# Altium PCB Quad FC 10.6.7.PcbDoc
Units mm, origin at the board's own origin, x right, y up, seen from the top; angles counter-clockwise.
Board outline 55.25 x 55.25 mm, 2 copper layers (Top Layer, Bottom Layer); 70 components, 50 nets, 277 pads, 13 vias.
Unrouted connection lines stored in the file: 118.
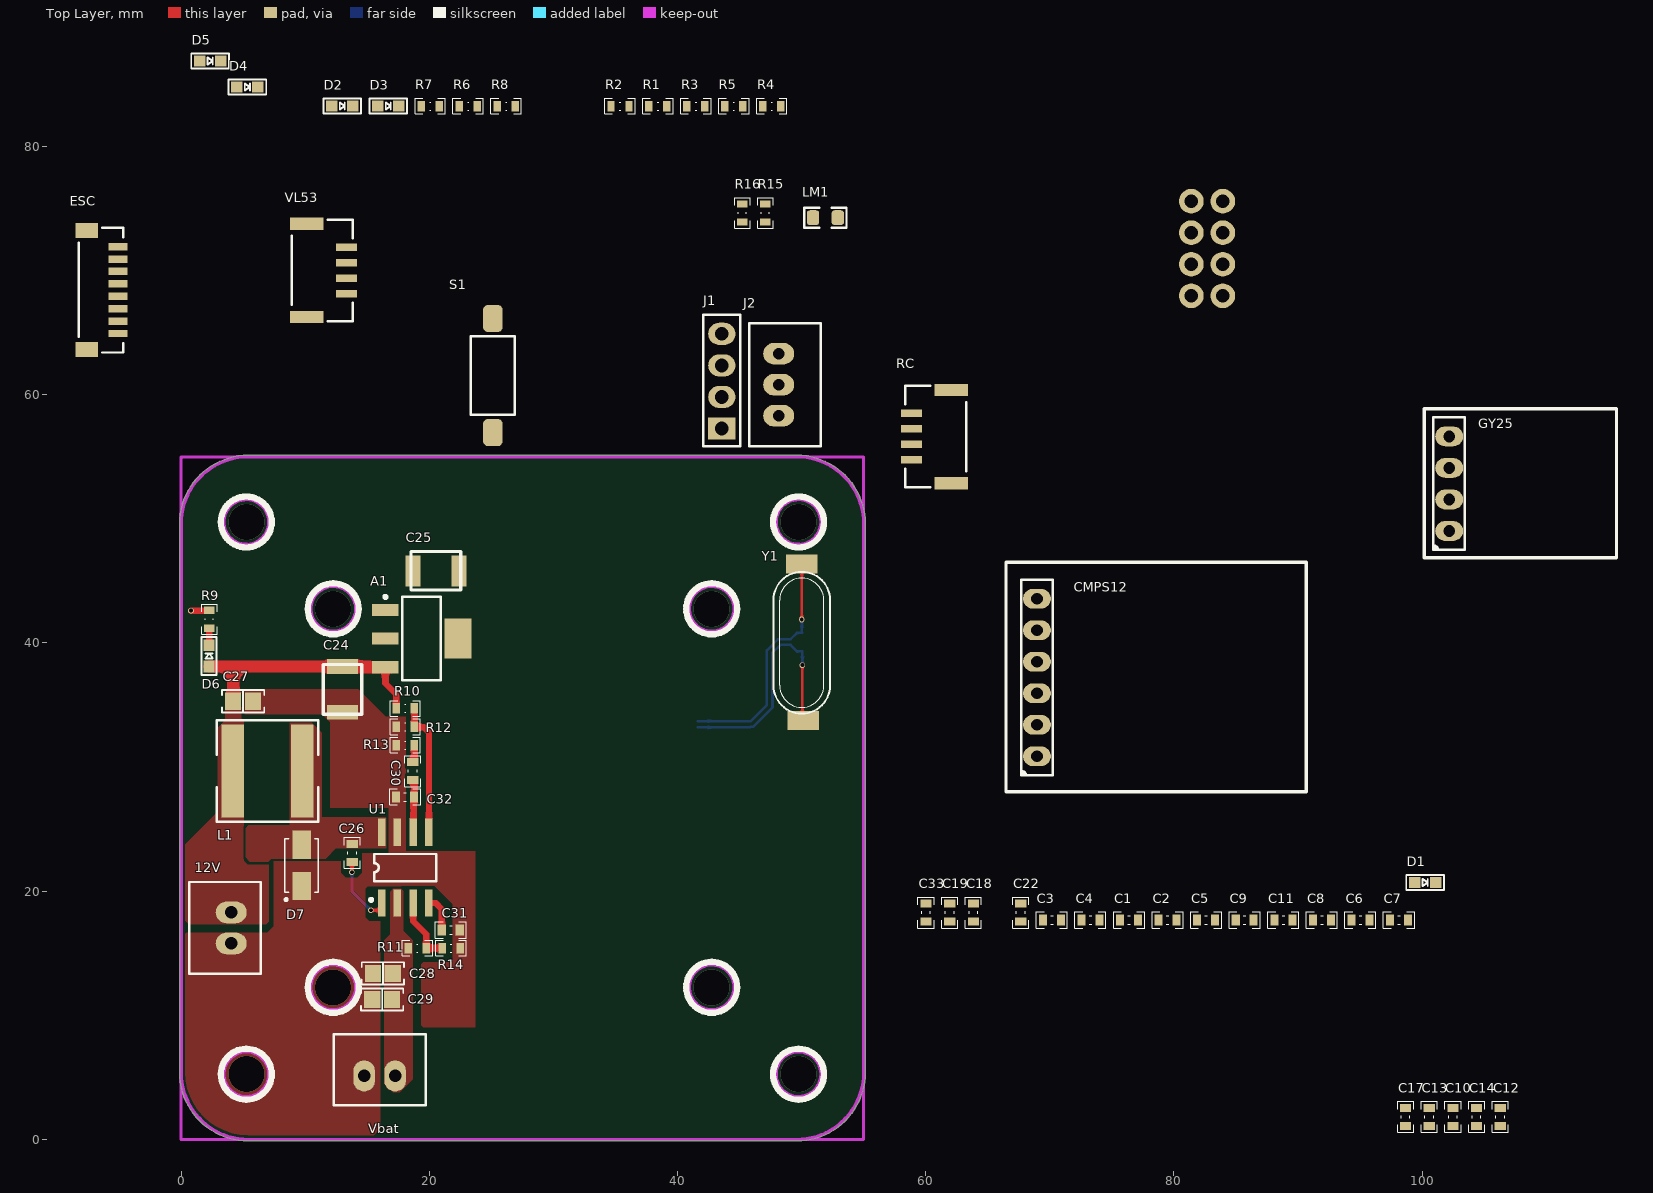
[diagram p0: Top Layer view]
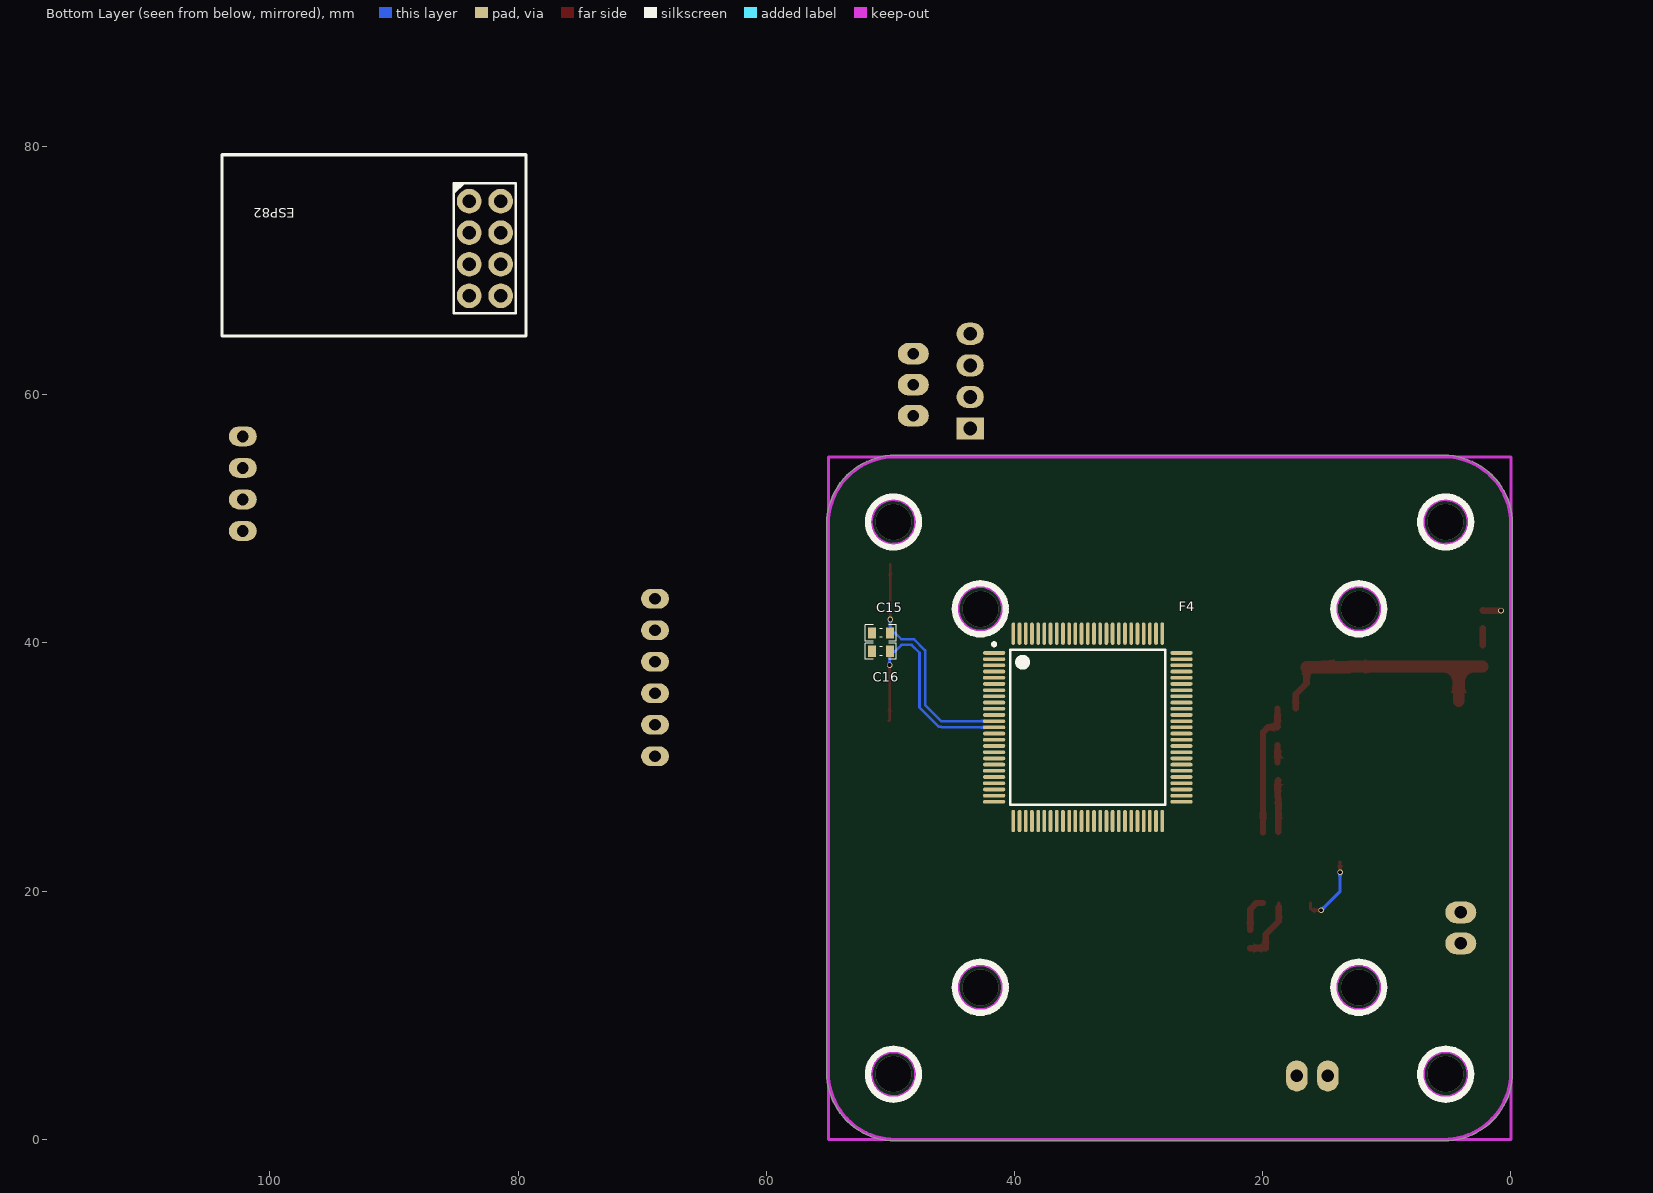
[diagram p1: Bottom Layer view, seen from below]

## Layer stack, top to bottom
Top Solder: solder mask 0.0102, Solder Resist, Dk 3.5
Top Layer: signal copper 0.0356
Dielectric 1: dielectric 0.32, FR-4, Dk 4.8
Bottom Layer: signal copper 0.0356
Bottom Solder: solder mask 0.0102, Solder Resist, Dk 3.5

## Board outline
5.4,-0.127 cw(c5.4,5.4) -0.127,5.4 -0.127,49.6 -0.127,49.601 cw(c5.4,49.6) 5.4,55.127 49.6,55.127 cw(c49.6,49.6) 55.127,49.6 55.127,42.75 55.127,5.4 cw(c49.6,5.4) 49.6,-0.127

## Design rules (kind name [scope] priority, off if disabled: settings)
Clearance MCU [InComponent('F4')] p1: gap=0.152 ignorepadtopadclearanceinfootprint=FALSE except(0: Arc-Hole Track-Hole SMDPad-Hole THPad-Hole Via-Hole Fill-Hole Poly-Hole Region-Hole Text-Hole)
Clearance [All] p2: gap=0.203 ignorepadtopadclearanceinfootprint=FALSE except(0: Arc-Hole Track-Hole SMDPad-Hole THPad-Hole Via-Hole Fill-Hole Poly-Hole Region-Hole Text-Hole)
DiffPairsRouting [All] p1: maxlimit=0.254 minlimit=0.254 mostfreqgap=0.254 toplayer_minwidth=0.203 toplayer_maxwidth=0.381 toplayer_prefwidth=0.254 bottomlayer_minwidth=0.203 bottomlayer_maxwidth=0.381 bottomlayer_prefwidth=0.254 maxuncoupledlength=12.7
HoleSize [All] p1: absolutevalues=TRUE maxlimit=3 minlimit=0.025 maxpercent=80.000 minpercent=20.000
HoleToHoleClearance [All] p1: gap=0.203 allowstackedmicrovias=TRUE
PolygonConnect PolygonConnect_5 [All vs IsNamedPolygon('VBAT+_L01_P000')] p1: connectstyle=Direct reliefconductorwidth=0.254 reliefentries=4 polygonreliefangle="90 Angle" airgapwidth=0.254
PolygonConnect PolygonConnect_4 [All vs IsNamedPolygon('12V_L01_P004')] p2: connectstyle=Direct reliefconductorwidth=0.254 reliefentries=4 polygonreliefangle="90 Angle" airgapwidth=0.254
PolygonConnect PolygonConnect_3 [All vs IsNamedPolygon('GND_L01_P003')] p3: connectstyle=Direct reliefconductorwidth=0.254 reliefentries=4 polygonreliefangle="90 Angle" airgapwidth=0.254
PolygonConnect PolygonConnect_2 [All vs IsNamedPolygon('NETC26_1_L01_P002')] p4: connectstyle=Direct reliefconductorwidth=0.254 reliefentries=4 polygonreliefangle="90 Angle" airgapwidth=0.254
PolygonConnect PolygonConnect_1 [All vs IsNamedPolygon('12V_L01_P004')] p5: connectstyle=Direct reliefconductorwidth=0.254 reliefentries=4 polygonreliefangle="90 Angle" airgapwidth=0.254
PolygonConnect [All] p6: connectstyle=Relief reliefconductorwidth=0.254 reliefentries=4 polygonreliefangle="90 Angle" airgapwidth=0.254
RoutingVias [All] p1: holewidth=0.3 width=0.45 viastyle="Through Hole" minholewidth=0.2 minwidth=0.3 maxholewidth=3 maxwidth=3
SilkToSilkClearance [All] p1: silktosilkclearance=0.203
SilkToSolderMaskClearance [IsPad] p1: minsilkscreentomaskgap=8 clearancetoexposedcopper=TRUE
SolderMaskExpansion [All] p1: expansion=0.102 istentingtop=FALSE
Width GND [All] p1: maxlimit=1.016 minlimit=0.254 preferedwidth=0.508
Width Vbat+ [All] p2: maxlimit=1.016 minlimit=0.508 preferedwidth=0.762
Width 12V [All] p3: maxlimit=1.016 minlimit=0.508 preferedwidth=0.762
Width 3.3V [All] p4: maxlimit=1.016 minlimit=0.254 preferedwidth=0.508
Width [All] p5: maxlimit=0.508 minlimit=0.203 preferedwidth=0.254
25 further rules are at their usual default settings.

## Classes and differential pairs
component class "Quad FC V10.6": C1 C2 C3 C4 C5 C6 C7 C8 C9 C10 C11 C12 C13 C14 C15 C16 C17 C18 C19 C22 C33 CMPS12 D1 D2 D3 D4 ESP82 F4 GY25 J1 J2 LM1 R1 R2 R3 R4 R5 R6 R7 R15 R16 RC S1 VL53 Y1
component class "Quad FC power V10.6": 12V A1 C24 C25 C26 C27 C28 C29 C30 C31 C32 D5 D6 D7 ESC L1 R8 R9 R10 R11 R12 R13 R14 U1 Vbat
differential pair F407_OSC: +F407_OSC_P -F407_OSC_N

## Components (designator, comment, footprint, x,y, rotation, side; value= is the part's Value field where it differs from the comment)
12V "Jetson Power" "JST XH B2B-XH-A" 4.03,17.04 r270 top
A1 "3.3V linear regulator" SOT230P700X180-4N 19.38,40.36 r0 top
C1 "100nF" CAP0603 76.38,17.676 r0 top
C2 "1uF" CAP0603 79.488,17.676 r0 top
C3 "100nF" CAP0603 70.164,17.676 r0 top
C4 "100nF" CAP0603 73.272,17.676 r0 top
C5 "100nF" CAP0603 82.596,17.676 r0 top
C6 "100nF" CAP0603 95.028,17.676 r0 top
C7 "100nF" CAP0603 98.136,17.676 r0 top
C8 "1uF" CAP0603 91.92,17.676 r0 top
C9 "100nF" CAP0603 85.704,17.676 r0 top
C10 "4.7uF" CAP0603 102.485,1.808 r90 top
C11 "100nF" CAP0603 88.812,17.676 r0 top
C12 "100nF" CAP0603 106.301,1.808 r90 top
C13 "100nF" CAP0603 100.577,1.808 r90 top
C14 "100nF" CAP0603 104.393,1.808 r90 top
C15 "10pF" CAP0603 50.77,40.81 r180 bottom
C16 "10pF" CAP0603 50.77,39.33 r0 bottom
C17 "2.2uF" CAP0603 98.669,1.808 r90 top
C18 "2.2uF" CAP0603 63.84,18.276 r90 top
C19 "100nF" CAP0603 61.932,18.276 r90 top
C22 "100nF" CAP0603 67.656,18.276 r90 top
C24 "10uF" MY_CAP_SMD-B 13,36.26 r270 top value=3300u
C25 "100uF" MY_CAP_SMD-B 20.53,45.81 r180 top value=3300u
C26 "100nF" CAP0603 13.78,23.08 r270 top
C27 "10 µF" "CAP 0805_2012" 4.99,35.31 r180 top
C28 "10 µF" "CAP 0805_2012" 16.25,13.37 r0 top
C29 "10 µF" "CAP 0805_2012" 16.2,11.27 r0 top
C30 "1nF" CAP0603 18.66,29.68 r90 top
C31 "8.2nF" CAP0603 21.725,16.87 r0 top
C32 "10pF" CAP0603 18.05,27.6 r180 top
C33 "100nF" CAP0603 60.024,18.276 r90 top
CMPS12 "CMPS12" "SAMTEC SSW-106-03-T-S" 68.96,37.22 r90 top
D1 "LED" "0603 - LED" 100.249,20.7 r0 top
D2 "LED" "0603 - LED" 12.979,83.27 r0 top
D3 "LED" "0603 - LED" 16.688,83.27 r0 top
D4 "LED" "0603 - LED" 5.33,84.8 r0 top
D5 "LED" "0603 - LED" 2.339,86.9 r0 top
D6 "LED" "0603 - LED" 2.25,38.96 r90 top
D7 "1n5822" DIOM4226X244N 9.71,22.07 r90 top
ESC "ESC" "JST BM08B-SRSS-TB" -6.36,68.44 r90 top
ESP82 "ESP82" "HARWIN M20-7830445" 82.67,71.79 r180 bottom
F4 "STM32F407VGT6" STM-LQFP100_N 34.09,33.2 r180 bottom
GY25 "GY25" "SAMTEC SSW-104-03-T-S" 102.18,52.84 r90 top
J1 "Programming Pin" "HEADER 4X1" 43.566,57.287 r90 top
J2 "Jetson Uart connector" "JST XH B3B-XH-A" 48.149,60.812 r90 top
L1 "10 µH" "TAIYO YUDEN NRS8030" 6.95,29.68 r180 top
LM1 "10uH" 0805L 51.914,74.273 r0 top value=FB805
R1 "0" RES0603 38.419,83.259 r0 top
R2 "1K" RES0603 35.361,83.259 r0 top
R3 "1K" RES0603 41.477,83.259 r0 top
R4 "1K" RES0603 47.593,83.259 r0 top
R5 "1K" RES0603 44.535,83.259 r0 top
R6 "1K" RES0603 23.129,83.259 r0 top
R7 "1K" RES0603 20.071,83.259 r0 top
R8 "1K" RES0603 26.187,83.259 r0 top
R9 "1K" RES0603 2.27,41.91 r90 top
R10 "10.2k" RES0603 18.06,34.73 r180 top
R11 "0.732k" RES0603 19.03,15.41 r180 top
R12 "0.732k" RES0603 18.06,33.25 r0 top
R13 "36.5K" RES0603 18.06,31.77 r0 top value=36.5k
R14 "0.732k" RES0603 21.75,15.41 r180 top
R15 "0" RES0603 47.073,74.648 r90 top
R16 "0" RES0603 45.215,74.648 r90 top
RC "Radio Controller" "JST SM04B-GHS-TB" 60.735,56.635 r270 top
S1 "FSMSMTR" "TE FSMSMTR" 25.113,61.554 r0 top
U1 "TPS54331" SO8 18.06,21.9 r0 top
Vbat "FC power" "JST XH B2B-XH-A" 16,5.11 r180 top
VL53 "VL53L0" "JST SM04B-GHS-TB" 11.455,70.02 r90 top
Y1 "CRYSTAL_SMD" "My_Crystal - SMD" 50.01,40.02 r90 top

## Footprints (in the part's own frame and the unit in brackets; to place one, negate y for a bottom-side part, rotate by r counter-clockwise, add the part's x,y. Pads: shape width x height; smd on the part's side, far side on the other; paste and mask are expansions set on the pad)
"0603 - LED" [mil]
  rect 37x35 smd: 1(-33.5,0) 2(33.5,0)
  silkscreen extent -60,-24 60,24, body extent -32,-16 32,16, height 43
0805L [mm] ",0805, 2012, 200X130"
  rrect50% 1x1.2 smd mask+0.075: 1(-1,0) 2(1,0)
  Top Layer pour cut-out: -0.5,0.8 0.5,0.8 0.5,-0.8 -0.5,-0.8
  silkscreen extent -1.7,-0.8 1.7,0.8, body extent -1,-0.6 1,0.6, height 0.95
CAP0603 [mm] "Chip Capacitor, 2-Leads, Body 1/60x0/80mm, IPC Medium Density DESIGNER:ABBAS BASEREH"
  rect 0.65x0.9 smd: 1(-0.725,0) 2(0.725,0)
  silkscreen extent -1.25,-0.65 1.25,0.65, body extent -0.82,-0.43 0.82,0.43, height 0.4
"CAP 0805_2012" [mm] "Chip Capacitor, 2-Leads, Body 2.00x1.20mm, IPC Medium Density"
  rect 1.3x1.4 smd: 1(-0.8,0) 2(0.8,0)
  silkscreen extent -1.7,-0.9 1.7,0.9, body extent -1,-0.64 1,0.64, height 1.26
DIOM4226X244N [mm]
  rect 2.26x1.51 smd: 1(-1.67,0) 2(1.67,0)
  silkscreen extent -2.85,-1.35 2.15,1.35, body extent -2.6,-1.36 2.6,1.36, height 1.19
"HARWIN M20-7830445" [mm] "2.54mm DIL PC TAIL PIN HEADER ASSEMBLY"
  round 2 hole 1.1: 1(-1.27,3.81) 2(-1.27,1.27) 3(-1.27,-1.27) 4(-1.27,-3.81) 5(1.27,-3.81) 6(1.27,-1.27) 7(1.27,1.27) 8(1.27,3.81)
  silkscreen extent -2.5,-5.23 2.5,5.27, body extent -2.52,-5.28 2.52,5.28, height 8.5
"HEADER 4X1" [mm]
  rect 1.8x2.2 hole 1.1: 1(0,0)
  oval 1.8x2.2 hole 1.1: 2(2.54,0) 3(5.08,0) 4(7.62,0)
  silkscreen extent -1.43,-1.5 9.18,1.5, body extent -1.19,-1.22 8.97,1.32, height 8.38
"JST BM08B-SRSS-TB" [mm] "1.0mm pitch/Disconnectable Crimp style connector"
  rect 0.6x1.55 smd: 1(-3.5,-1.262) 2(-2.5,-1.262) 3(-1.5,-1.262) 4(-0.5,-1.262) 5(0.5,-1.262) 6(1.5,-1.262) 7(2.5,-1.262) 8(3.5,-1.262)
  rect 1.2x1.8 smd: M(-4.8,1.262) M(4.8,1.262)
  silkscreen extent -5.03,-1.68 5.03,1.91, body extent -5,-1.69 5,1.91, height 4.32
"JST SM04B-GHS-TB" [mm] "1.25mm pitch/Disconnectable Crimp style connectors"
  rect 0.6x1.7 smd: 1(-1.875,-1.875) 2(-0.625,-1.875) 3(0.625,-1.875) 4(1.875,-1.875)
  rect 1x2.7 smd: M(-3.75,1.325) M(3.75,1.325)
  silkscreen extent -4.1,-2.37 4.1,2.54, body extent -4.12,-2.31 4.13,2.54, height 4.35
"JST XH B2B-XH-A" [mm]
  oval 1.75x2.5 hole 1: 1(-1.25,0) 2(1.25,0)
  silkscreen extent -3.7,-3.38 3.7,2.38, body extent -3.7,-3.38 3.7,2.38, height 7
"JST XH B3B-XH-A" [mm]
  oval 1.75x2.5 hole 0.9: 1(-2.5,0) 2(0,0) 3(2.5,0)
  silkscreen extent -4.95,-3.38 4.95,2.38, body extent -4.95,-3.38 4.95,2.38, height 7
MY_CAP_SMD-B [mm] "3.1X4"
  rect 1.2x2.5 smd: +(-1.845,0) -(1.845,0)
  silkscreen extent -2,-1.55 2,1.55, body extent -1.85,-1.41 1.85,1.41, height 2.14
"My_Crystal - SMD" [mm]
  rect 1.524x2.54 smd: 1(-6.275,-0.1) 2(6.33,0.01)
  silkscreen extent -5.71,-2.29 5.71,2.29, body extent -6.28,-2.5 6.22,2.3, height 3.92
RES0603 [mm] "Chip Resistor, 2-Leads, Body 1/60x0/80mm, IPC Medium Density DESIGNER:ABBAS BASEREH"
  rect 0.6x0.85 smd: 1(-0.725,0) 2(0.725,0)
  silkscreen extent -1.22,-0.63 1.22,0.63, body extent -0.82,-0.43 0.82,0.43, height 0.4
"SAMTEC SSW-104-03-T-S" [mm]
  oval 1.6x2.25 hole 0.95: 1(-3.81,0) 2(-1.27,0) 3(1.27,0) 4(3.81,0)
  silkscreen extent -5.34,-1.27 5.34,1.27, body extent -5.33,-1.21 5.33,1.21, height 8.51
"SAMTEC SSW-106-03-T-S" [mm]
  oval 1.6x2.25 hole 0.95: 1(-6.35,0) 2(-3.81,0) 3(-1.27,0) 4(1.27,0) 5(3.81,0) 6(6.35,0)
  silkscreen extent -7.88,-1.27 7.88,1.27, body extent -7.87,-1.21 7.87,1.21, height 8.51
SO8 [mm]
  rect 0.6x2.2 smd: 1(-1.905,-2.854) 2(-0.635,-2.854) 3(0.635,-2.854) 4(1.905,-2.854) 5(1.905,2.854) 6(0.635,2.854) 7(-0.635,2.854) 8(-1.905,2.854)
  silkscreen extent -2.88,-2.72 2.5,1.1, body extent -2.46,-2.79 2.44,2.98, height 1.45
SOT230P700X180-4N [mm] "SOT223, 4-Leads, Body 6.50x7.00mm (avg), Pitch 2.30mm, IPC Medium Density"
  rect 2.15x1 smd: 1(-2.925,2.3) 2(-2.925,0) 3(-2.925,-2.3)
  rect 2.15x3.25 smd: 4(2.925,0)
  silkscreen extent -3.05,-3.35 1.55,3.47, body extent -1.85,-3.35 1.85,3.35, height 1.8
STM-LQFP100_N [mm] "Thin QFP, 100-Leads, Body 14x14mm, Pitch 0.5mm, IPC Medium Density"
  oval 1.8x0.3 smd: 1(-7.55,6) 2(-7.55,5.5) 3(-7.55,5) 4(-7.55,4.5) 5(-7.55,4) 6(-7.55,3.5) 7(-7.55,3) 8(-7.55,2.5) 9(-7.55,2) 10(-7.55,1.5) 11(-7.55,1) 12(-7.55,0.5) 13(-7.55,0) 14(-7.55,-0.5) 15(-7.55,-1) 16(-7.55,-1.5) 17(-7.55,-2) 18(-7.55,-2.5) 19(-7.55,-3) 20(-7.55,-3.5) 21(-7.55,-4) 22(-7.55,-4.5) 23(-7.55,-5) 24(-7.55,-5.5) 25(-7.55,-6) 51(7.55,-6) 52(7.55,-5.5) 53(7.55,-5) 54(7.55,-4.5) 55(7.55,-4) 56(7.55,-3.5) 57(7.55,-3) 58(7.55,-2.5) 59(7.55,-2) 60(7.55,-1.5) 61(7.55,-1) 62(7.55,-0.5) 63(7.55,0) 64(7.55,0.5) 65(7.55,1) 66(7.55,1.5) 67(7.55,2) 68(7.55,2.5) 69(7.55,3) 70(7.55,3.5) 71(7.55,4) 72(7.55,4.5) 73(7.55,5) 74(7.55,5.5) 75(7.55,6)
  oval 0.3x1.8 smd: 26(-6,-7.55) 27(-5.5,-7.55) 28(-5,-7.55) 29(-4.5,-7.55) 30(-4,-7.55) 31(-3.5,-7.55) 32(-3,-7.55) 33(-2.5,-7.55) 34(-2,-7.55) 35(-1.5,-7.55) 36(-1,-7.55) 37(-0.5,-7.55) 38(0,-7.55) 39(0.5,-7.55) 40(1,-7.55) 41(1.5,-7.55) 42(2,-7.55) 43(2.5,-7.55) 44(3,-7.55) 45(3.5,-7.55) 46(4,-7.55) 47(4.5,-7.55) 48(5,-7.55) 49(5.5,-7.55) 50(6,-7.55) 76(6,7.55) 77(5.5,7.55) 78(5,7.55) 79(4.5,7.55) 80(4,7.55) 81(3.5,7.55) 82(3,7.55) 83(2.5,7.55) 84(2,7.55) 85(1.5,7.55) 86(1,7.55) 87(0.5,7.55) 88(0,7.55) 89(-0.5,7.55) 90(-1,7.55) 91(-1.5,7.55) 92(-2,7.55) 93(-2.5,7.55) 94(-3,7.55) 95(-3.5,7.55) 96(-4,7.55) 97(-4.5,7.55) 98(-5,7.55) 99(-5.5,7.55) 100(-6,7.55)
  silkscreen extent -7.68,-6.25 6.25,6.82, body extent -7,-7 7,7, height 1.6
"TAIYO YUDEN NRS8030" [mm] "Precision Wire Wound Inductor, 2-Leads, Body 8.00x8.00mm, IPC Medium Density"
  rect 1.8x7.5 smd: 1(-2.8,0) 2(2.8,0)
  silkscreen extent -4.1,-4.1 4.1,4.1, body extent -4,-4 4,4, height 3
"TE FSMSMTR" [mm]
  rrect50% 1.6x2.19 smd: 1(0,4.595) 2(0,-4.595)
  silkscreen extent -1.78,-3.17 1.78,3.17, body extent -1.75,-4.98 1.75,4.98, height 4.42

## Part data
12V Vbat: library part B2B-XH-A(LF)(SN), "CONN HEADER VERT 2POS 2.5MM", Current Rating (Amps)=3A, Insulation Color=Natural, Manufacturer="JST Sales America Inc.", Material Flammability Rating="UL94 V-0", Operating Temperature="-25°C ~ 85°C", Supplier Part Number 1=455-2247-ND, Voltage Rating=250V, ComponentLink1Description=Datasheet, ComponentLink1URL=http://www.jst-mfg.com/product/pdf/eng/eXH.pdf, ComponentLink2Description="DigiKey Link", ComponentLink2URL=http://digikey.com/product-detail/en/jst-sales-america-inc/B2B-XH-A-LF-SN/455-2247-ND/1651045, Connector Type=Header, Contact Finish - Mating=Tin, Contact Finish - Post=Tin, Contact Length - Post="0.134\" (3.40mm)", Contact Material=Brass, Contact Shape=Square, Contact Type="Male Pin", Fastening Type="Detent Lock", Insulation Height="0.276\" (7.00mm)", Insulation Material="Polyamide (PA66), Nylon 6/6", LastUpdated="1/12/2020 11:46:08 PM", Lifecycle Status=Active, Minimum Order=1, Mounting Type="Through Hole", Number of Positions=2, Number of Positions Loaded=All, Number of Rows=1, Packaging=Bulk, Part Number=B2B-XH-A(LF)(SN), Part Status=Active, partid=67, Pitch - Mating="0.098\" (2.50mm)", Price=0.15, Series=XH, Shrouding="Shrouded - 4 Wall", Style="Board to Cable/Wire", Supplier 1=DigiKey, Termination="Press-Fit, Solder"
A1: library part ams1117
C1 C2 C3 C4 C5 C6 C7 C8 C9 C10 C11 C12 C13 C14 C15 C16 C17 C18 C19 C22 C26 C30 C31 C32 C33: library part "CAP SMD PACKAGE", "F407VET6 Power CAP", Data=2017-3-10, Desc.="CAP SMD TOTAL PACKAGES", Designer="Abbas Basereh"
C24 C25: library part CAP_TANTAL_B, "3.5X2.8MM"
C27 C28 C29: library part GRM21BR61H106KE43K, "CAP CER 10UF 50V X5R 0805", Device Package="0805 (2012 Metric)", Manufacturer="Murata Electronics", Operating Temperature="-55°C ~ 85°C", Supplier Part Number 1=490-GRM21BR61H106KE43KCT-ND, Temperature Coefficient=X5R, Tolerance=±10%, Voltage - Rated=50V, Applications="General Purpose", Capacitance="10 µF", ComponentLink1Description=Datasheet, ComponentLink1URL=https://search.murata.co.jp/Ceramy/image/img/A01X/G101/ENG/GRM21BR61H106KE43-01A.pdf, ComponentLink2Description="DigiKey Link", ComponentLink2URL=https://www.digikey.com/en/products/detail/murata-electronics/GRM21BR61H106KE43K/15191954, LastUpdated="2/9/2024 8:15:01 PM", Lifecycle Status=Active, Minimum Order=1, Mounting Type="Surface Mount, MLCC", Package / Case="0805 (2012 Metric)", Packaging=TapeAndReel, Part Number=GRM21BR61H106KE43K, Part Status=Active, partid=40508, Price=0.05, Series=GRM, Size / Dimension="0.079\" L x 0.049\" W (2.00mm x 1.25mm)", Supplier 1=DigiKey, Thickness (Max)="0.057\" (1.45mm)"
CMPS12: library part SSW-106-03-T-S, "CONN RCPT 6POS 0.1 TIN PCB", Current Rating (Amps)="5.7A per Contact", Insulation Color=Black, Manufacturer="Samtec Inc.", Material Flammability Rating="UL94 V-0", Operating Temperature="-55°C ~ 105°C", Supplier Part Number 1=SAM8865-ND, ComponentLink1Description=Datasheet, ComponentLink1URL=http://suddendocs.samtec.com/prints/ssw-s.pdf, ComponentLink2Description="DigiKey Link", ComponentLink2URL=https://www.digikey.com/en/products/detail/samtec-inc/SSW-106-03-T-S/1790202, Connector Type=Receptacle, Contact Finish - Mating=Tin, Contact Finish - Post=Tin, Contact Length - Post="0.394\" (10.00mm)", Contact Type=Forked, Fastening Type=Push-Pull, Insulation Height="0.335\" (8.51mm)", LastUpdated="6/21/2022 3:09:22 PM", Lifecycle Status=Active, Minimum Order=1, Mounting Type="Through Hole", Number of Positions=6, Number of Positions Loaded=All, Number of Rows=1, Packaging=Bulk, Part Number=SSW-106-03-T-S, Part Status=Active, Pitch - Mating="0.100\" (2.54mm)", Price=0.55, Series=SSW, Style="Board to Board or Cable", Supplier 1=DigiKey, Termination=Solder
D1 D2 D3 D4 D5 D6: "Led", LatestRevisionDate=08-Jul-2005, LatestRevisionNote="Mech Layer 1 removed.", PackageReference=LED-0, Published=8-Jun-2000, Publisher="Altium Limited"
D7: library part "1n5822 SMD", "Schottky Rectifiers", Manufacturer="ON Semiconductor/Fairchild", Data=16-12-2016, Designer="Abbas Basereh", Link=https://www.aliexpress.com/item/Free-shipping-100pcs-1n5822-sma-smd-do-214ac-Schottky-diode-ss34/32337482329.html?spm=2114.01010208.3.1.zLZDsP&ws_ab_test=searchweb0_0,searchweb201602_4_10065_10068_10084_10083_10080_10082_10081_10060_10061_10062_10056_10055_10054_10059_10099_10078_10079_427_10073_10103_10102_10096_10052_10050_10051,searchweb201603_4&btsid=6e50dc92-ac69-45bc-a19e-209af19ce602, Part. No=SS34
ESC: library part BM08B-SRSS-TBT(LF)(SN), "CONN HEADER SMD 8POS 1MM", Part Number=BM08B-SRSS-TBT(LF)(SN)
ESP82: library part M20-7830442, "CONN RCPT 8POS 0.1 GOLD PCB", Current Rating (Amps)=3A, Insulation Color=Black, Manufacturer="Harwin Inc.", Material Flammability Rating="UL94 V-0", Operating Temperature="-40°C ~ 105°C", Supplier Part Number 1=952-1789-ND, ComponentLink1Description=Datasheet, ComponentLink1URL=https://cdn.harwin.com/pdfs/C001XX_M20_Series_Connectors.pdf, ComponentLink2Description="DigiKey Link", ComponentLink2URL=http://digikey.com/product-detail/en/harwin-inc/M20-7830442/952-1789-ND/3727758, Connector Type=Receptacle, Contact Finish - Mating=Gold, Contact Finish - Post=Tin, Contact Finish Thickness - Mating=Flash, Contact Length - Post="0.118\" (3.00mm)", Contact Type="Female Socket", Fastening Type=Push-Pull, Insulation Height="0.335\" (8.51mm)", LastUpdated="9/21/2022 7:04:26 PM", Lifecycle Status=Active, Mated Stacking Heights="11.04mm, 12.63mm", Minimum Order=1, Mounting Type="Through Hole", Number of Positions=8, Number of Positions Loaded=All, Number of Rows=2, Packaging=Tube, Part Number=M20-7830442, Part Status=Active, Pitch - Mating="0.100\" (2.54mm)", Price=1.36, Row Spacing - Mating="0.100\" (2.54mm)", Series=M20, Style="Board to Board or Cable", Supplier 1=DigiKey, Termination=Solder
F4: "ARM Cortex-M4 32-bit MCU+FPU, 210 DMIPS, 1024 kB Flash, 192 kB Internal RAM, 82 I/Os, 100-pin LQFP, -40 to 85 degC, Tray", I/Os (High Current)=82, Manufacturer=STMicroelectronics, Operating Frequency(F) (Processor speed) (MHz)=168, Supplier Part Number 1=497-11605-ND, Supply Voltage(Vcc) max (V)=3.6, Supply Voltage(Vcc) min (V)=1.8, ComponentLink1Description="Manufacturer URL", ComponentLink1URL=http://www.st.com/web/en/home.html, ComponentLink2Description=Datasheet, ComponentLink2URL=http://www.st.com/st-web-ui/static/active/en/resource/technical/document/datasheet/DM00037051.pdf, ComponentLink3Description="Package Specification", ComponentLink3URL=http://www.st.com/st-web-ui/static/active/en/resource/technical/document/data_brief/DM00071938.pdf, Core="ARM Cortex-M4", D/A Converter=2x12-bit, DatasheetVersion="Rev. 4", FLASH Size (Prog) (kB)=1024, Internal RAM Size (kB)=192, Mounting Technology="Surface Mount", PackageDescription="100-Pin Low Profile Quad Flat Package, 14 x 14 mm Body, 0.5 mm Pitch", PackageReference=LQFP100, PackageVersion="Rev. 1, 06/2013", Packing=Tray, PartNumber=STM32F407VGT6, Supplier 1=Digi-Key, Supplier 2=Farnell, Supplier 3=Newark, Supplier 4=Mouser, Supplier Part Number 2=2064368, Supplier Part Number 3=73T2333, Supplier Part Number 4=511-STM32F407VGT6
GY25: library part SSW-104-03-T-S, "CONN RCPT 4POS 0.1 TIN PCB", Current Rating (Amps)="5.7A per Contact", Insulation Color=Black, Manufacturer="Samtec Inc.", Material Flammability Rating="UL94 V-0", Operating Temperature="-55°C ~ 105°C", Supplier Part Number 1=SSW-104-03-T-S-ND, ComponentLink2Description="DigiKey Link", ComponentLink2URL=http://digikey.com/product-detail/en/samtec-inc/SSW-104-03-T-S/SSW-104-03-T-S-ND/7874034, Connector Type=Receptacle, Contact Finish - Mating=Tin, Contact Finish - Post=Tin, Contact Type=Forked, Fastening Type=Push-Pull, LastUpdated="6/21/2022 3:08:52 PM", Lifecycle Status=Active, Minimum Order=1, Mounting Type="Through Hole", Number of Positions=4, Number of Positions Loaded=All, Number of Rows=1, Packaging=Bulk, Part Number=SSW-104-03-T-S, Part Status=Active, Price=0.83, Series=SSW, Style="Board to Board or Cable", Supplier 1=DigiKey, Termination=Solder
J1: library part Header4X1
J2: library part B3B-XH-A(LF)(SN), "CONN HEADER VERT 3POS 2.5MM", Current Rating (Amps)=3A, Insulation Color=Natural, Manufacturer="JST Sales America Inc.", Material Flammability Rating="UL94 V-0", Operating Temperature="-25°C ~ 85°C", Supplier Part Number 1=455-2248-ND, Voltage Rating=250V, ComponentLink1Description=Datasheet, ComponentLink1URL=http://www.jst-mfg.com/product/pdf/eng/eXH.pdf, ComponentLink2Description="DigiKey Link", ComponentLink2URL=http://digikey.com/product-detail/en/jst-sales-america-inc/B3B-XH-A-LF-SN/455-2248-ND/1651046, Connector Type=Header, Contact Finish - Mating=Tin, Contact Finish - Post=Tin, Contact Length - Post="0.134\" (3.40mm)", Contact Material=Brass, Contact Shape=Square, Contact Type="Male Pin", Fastening Type="Detent Lock", Insulation Height="0.276\" (7.00mm)", Insulation Material="Polyamide (PA66), Nylon 6/6", LastUpdated="1/12/2020 11:46:22 PM", Lifecycle Status=Active, Minimum Order=1, Mounting Type="Through Hole", Number of Positions=3, Number of Positions Loaded=All, Number of Rows=1, Packaging=Bulk, Part Number=B3B-XH-A(LF)(SN), Part Status=Active, partid=68, Pitch - Mating="0.098\" (2.50mm)", Price=0.19, Series=XH, Shrouding="Shrouded - 4 Wall", Style="Board to Cable/Wire", Supplier 1=DigiKey, Termination="Press-Fit, Solder"
L1: library part NRS8030T100MJGJV, "FIXED IND 10UH 3A 42.9 MOHM SMD", Current - Saturation=2.4A, Current Rating (Amps)="3 A", DC Resistance (DCR)="42.9mOhm Max", Device Package=Nonstandard, Frequency - Self Resonant=27MHz, Inductance Frequency - Test="100 kHz", Manufacturer="Taiyo Yuden", Operating Temperature="-40°C ~ 125°C", Ratings=AEC-Q200, Supplier Part Number 1=587-3647-1-ND, Tolerance=±20%, ComponentLink1Description=Datasheet, ComponentLink1URL="https://ds.yuden.co.jp/TYCOMPAS/ut/detail?pn=NRS8030T100MJGJV  &u=M", ComponentLink2Description="DigiKey Link", ComponentLink2URL=https://www.digikey.com/en/products/detail/taiyo-yuden/NRS8030T100MJGJV/4693986, Height - Seated (Max)="0.118\" (3.00mm)", Inductance="10 µH", LastUpdated="2/8/2024 9:55:48 PM", Lifecycle Status=Active, Material - Core=Ferrite, Minimum Order=1, Mounting Type="Surface Mount", Package / Case=Nonstandard, Packaging=TapeAndReel, Part Number=NRS8030T100MJGJV, Part Status=Active, partid=5482, Price=0.23, Series="NR, S Type", Shielding=Shielded, Size / Dimension="0.315\" L x 0.315\" W (8.00mm x 8.00mm)", Supplier 1=DigiKey, Type="Drum Core, Wirewound"
LM1: library part "L SMA 0.25W", "Inductor", Code_IEC=1005, Code_JEITA=0402, LatestRevisionDate=29-May-2009, LatestRevisionNote="IPC-7351 Footprint Added.", PackageDescription="Chip Inductor", PackageReference=0402-A, Published=8-Jun-2000, Publisher="Altium Limited"
R1 R2 R3 R4 R5 R6 R7 R8 R9 R10 R11 R12 R13 R14 R15 R16: library part "RES SMD PACKAGE", "TOTAL SMD RESISTOR PACK", Data=2017-3-10, Desc.="RES SMD PAKAGES", Designer="Abbas Basereh"
RC VL53: library part SM04B-GHS-TB(LF)(SN)-, "CONN HEADER SMD R/A 4POS 1.25MM", Current Rating (Amps)=1A, Insulation Color=Natural, Manufacturer="JST Sales America Inc.", Material Flammability Rating="UL94 V-0", Operating Temperature="-25°C ~ 85°C", Supplier Part Number 1=455-1566-1-ND, Voltage Rating=50V, ComponentLink1Description=Datasheet, ComponentLink1URL=http://www.jst-mfg.com/product/pdf/eng/eGH.pdf, ComponentLink2Description="DigiKey Link", ComponentLink2URL=http://digikey.com/product-detail/en/jst-sales-america-inc/SM04B-GHS-TB-LF-SN/455-1566-1-ND/807834, Connector Type=Header, Contact Finish - Mating=Tin, Contact Finish - Post=Tin, Contact Material="Phosphor Bronze", Contact Shape=Rectangular, Contact Type="Outer Shroud Contact", Fastening Type="Locking Ramp", Features="Solder Retention", Insulation Height="0.167\" (4.25mm)", Insulation Material="Polyamide (PA9T), Nylon 9T", LastUpdated="1/12/2020 11:37:43 PM", Lifecycle Status=Active, Minimum Order=1, Mounting Type="Surface Mount, Right Angle", Number of Positions=4, Number of Positions Loaded=All, Number of Rows=1, Packaging=TapeAndReel, Part Number=SM04B-GHS-TB(LF)(SN)-, Part Status=Active, partid=55, Pitch - Mating="0.049\" (1.25mm)", Price=0.21, Series=GH, Shrouding="Shrouded - 4 Wall", Style="Board to Cable/Wire", Supplier 1=DigiKey, Termination=Solder
S1: "SWITCH TACTILE SPST-NO 0.05A 24V", Contact Rating @ Voltage="0.05A @ 24VDC", Manufacturer="TE Connectivity ALCOSWITCH Switches", Operating Force=180gf, Operating Temperature="-35°C ~ 85°C", Supplier Part Number 1=450-1758-1-ND, Actuator Height off PCB, Vertical=4.57mm, Actuator Orientation="Top Actuated", Actuator Type=Standard, Circuit=SPST-NO, ComponentLink1Description=Datasheet, ComponentLink1URL=https://www.te.com/commerce/DocumentDelivery/DDEController?Action=srchrtrv&DocNm=1437566-3&DocType=Customer+Drawing&DocLang=English, ComponentLink2Description="DigiKey Link", ComponentLink2URL=https://www.digikey.com/en/products/detail/te-connectivity-alcoswitch-switches/FSMSMTR/529671, Illumination=Non-Illuminated, LastUpdated="2/8/2024 9:49:52 PM", Lifecycle Status=Active, Minimum Order=1, Mounting Type="Surface Mount", Outline="6.00mm x 3.50mm", Packaging=TapeAndReel, Part Number=FSMSMTR, Part Status=Active, Price=0.20, Series=FSMSM, Supplier 1=DigiKey, Switch Function=Off-Mom, Termination Style="Gull Wing"
U1: "DC/DC Switching Regulators 2A,28V,1MHz Step Down SWIFT DC/D;Output Voltage:0.8 V to 25 V", Link=http://javanelec.com/productsDetails.aspx?id=33786
Y1: "Crystal"

## Via types
v1: diameter 2.9, hole 2.9, Top Layer to Bottom Layer, 8 vias
v2: diameter 0.45, hole 0.3, Top Layer to Bottom Layer, 3 vias
v3: diameter 0.45, hole 0.3, Top Layer to Bottom Layer, tented both sides, 2 vias

## Nets (pads, with @x,y where several pads share a name; then routed paths per layer and width w, separated by ;. In a path a pad name is that pad's centre, name@x,y a point inside that pad or via, vN(x,y) a via of type N, cw(c..) or ccw(c..) an arc to the next point about the centre after c; other vN are vias at no path point)
3V3: A1.2 A1.4 C3.2 C4.2 C5.2 C6.2 C7.1 C8.1 C9.2 C10.2 C11.2 C12.2 C13.2 C19.1 C22.1 C25.+ C33.1 CMPS12.6 D5.1 ESP82.1 F4.11 F4.19 F4.21 F4.28 F4.50 F4.75 F4.100 GY25.4 J1.4 LM1.2 R2.1 R15.2 RC.1 VL53.4
12V: 12V.1 A1.3 C24.+ C27.2 D6.1 L1.2 R10.2 | length 20.6
  Top Layer w0.508: A1.3 16.455,36.765 17.335,35.885 R10.2
  Top Layer w0.94: D6.1@2.26,38.105 4.2,38.105 ; C27.2@4.2,35.32 4.2,38.105 ; C24.+ 4.2,38.105
  Top Layer w1.016: C24.+@13.045,38.06 A1.3
CMPS12_RX_SCL: CMPS12.4 F4.47 F4.55
CMPS12_TX_SDA: CMPS12.5 F4.48 F4.56
"ESC Rx": F4.25
"ESC Tx": ESC.1 F4.26
"ESP82 Rx": ESP82.8 F4.23
"ESP82 Tx": ESP82.4 F4.24
"F407 NRST": C14.1 F4.14 R2.2 S1.1
"F407 SWCLK": F4.76 J1.2
"F407 SWDIO": F4.72 J1.3
F407_OSC_N: C16.1 F4.13 Y1.1 | length 19.6
  Top Layer w0.203: v3(50.06,38.22) 50.06,33.794 Y1.1
  Bottom Layer w0.203: F4.13 45.86,33.2 45.903,33.243 46.092,33.243 47.65,34.801 47.65,39.211 48.28,39.841 49.107,39.841 49.618,39.33 C16.1 50.06,39.315 v3(50.06,38.22)
F407_OSC_P: C15.2 F4.12 Y1.2 | length 19.5
  Top Layer w0.203: Y1.2 50.01,46.34 v3(50.01,41.89)
  Bottom Layer w0.203: F4.12 45.903,33.7 47.193,34.99 47.193,39.401 48.091,40.299 49.107,40.299 49.618,40.81 C15.2 50.01,40.845 v3(50.01,41.89)
GND: 12V.2 A1.1 C1.1 C2.1 C3.1 C4.1 C5.1 C6.1 C7.2 C8.2 C9.1 C10.1 C11.1 C12.1 C13.1 C14.2 C15.1 C16.2 C17.2 C18.2 C19.2 C22.2 C24.- C25.- C27.1 C28.1 C29.1 C31.2 C32.2 C33.2 CMPS12.1 D7.1 ESC.8 ESP82.5 F4.10 F4.20 F4.27 F4.74 F4.99 GY25.1 J1.1 J2.3 R3.2 R4.2 R5.2 R6.2 R7.2 R8.2 R9.2 R12.1 R13.1 R14.1 R16.1 RC.2 S1.2 U1.7 Vbat.2 VL53.1 | length 1.5
  Top Layer w0.508: v2(0.79,42.61) 2.245,42.61 R9.2
  other v1: 5.25,5.25 12.25,12.25
"GY25 Rx": F4.80 GY25.3
"GY25 Tx": F4.83 GY25.2
Jetson_Uart_RX: J2.1
Jetson_Uart_TX: J2.2
LED1: D1.1 F4.96
LED2: D2.1 F4.95
LED3: D3.1 F4.43
LED4: D4.1 F4.44
NetC1_2: C1.2 C2.2 LM1.1 R1.1
NetC17_1: C17.1 F4.73
NetC18_1: C18.1 F4.49
NetC26_1: C26.1 D7.2 L1.1 U1.8
NetC26_2: C26.2 U1.1 | length 5.9
  Top Layer w0.254: v2(13.76,21.52) 13.76,22.335 C26.2 ; v2(15.29,18.46) 15.982,18.46 16.155,18.633 U1.1
  Bottom Layer w0.254: v2(13.76,21.52) 13.76,19.99 v2(15.29,18.46)
NetC30_1: C30.1 C32.1 U1.6 | length 4.2
  Top Layer w0.508: U1.6@18.73,24.789 18.73,27.485 18.79,27.545 18.79,28.884 C30.1@18.739,28.935
NetC30_2: C30.2 R13.2 | length 1.4
  Top Layer w0.508: C30.2@18.794,30.385 R13.2@18.794,31.761
NetC31_1: C31.1 U1.4 | length 2.9
  Top Layer w0.508: U1.4 20.504,19.046 21,18.55 C31.1
NetCMPS12_3: CMPS12.3 R15.1 R16.2
NetD1_2: D1.2 R4.1
NetD2_2: D2.2 R5.1
NetD3_2: D3.2 R6.1
NetD4_2: D4.2 R7.1
NetD5_2: D5.2 R8.1
NetD6_2: D6.2 R9.1 | length 1.4
  Top Layer w0.508: D6.2 2.26,39.821 2.26,41.175 R9.1
NetF4_22: F4.22 R1.2
NetF4_94: F4.94 R3.1
NetR10_1: R10.1 R12.2 U1.5 | length 10.9
  Top Layer w0.508: R12.2 18.825,33.21 19.57,33.21 19.965,32.815 U1.5 ; R12.2@18.8,33.265 R10.1@18.8,34.715
NetR11_1: R11.1 R14.2 U1.3 | length 5.4
  Top Layer w0.254: U1.3@18.695,18.745 18.74,18.79 18.695,18.835 U1.3
  Top Layer w0.508: U1.3@18.695,18.745 18.695,17.585 19.755,16.525 R11.1 R14.2
"PWM MOTOR 1": ESC.3 F4.59
"PWM MOTOR 2": ESC.4 F4.60
"PWM MOTOR 3": ESC.5 F4.61
"PWM MOTOR 4": ESC.6 F4.62
"RC PWM INPUT 1": F4.30 RC.3
"RC PWM INPUT 2": F4.31 RC.4
VBAT+: C28.2 C29.2 R11.2 U1.2 Vbat.1
VL53_SCL: F4.92 VL53.3
VL53_SDA: F4.93 VL53.2
pads on no net: CMPS12.2 ESC.2 ESC.7 ESC.M ESP82.2 ESP82.3 ESP82.6 ESP82.7 F4.1 F4.2 F4.3 F4.4 F4.5 F4.6 F4.7 F4.8 F4.9 F4.15 F4.16 F4.17 F4.18 F4.29 F4.32 F4.33 F4.34 F4.35 F4.36 F4.37 F4.38 F4.39 F4.40 F4.41 F4.42 F4.45 F4.46 F4.51 F4.52 F4.53 F4.54 F4.57 F4.58 F4.63 F4.64 F4.65 F4.66 F4.67 F4.68 F4.69 F4.70 F4.71 F4.77 F4.78 F4.79 F4.81 F4.82 F4.84 F4.85 F4.86 F4.87 F4.88 F4.89 F4.90 F4.91 F4.97 F4.98 RC.M VL53.M
copper on no net:
  other v1: 49.75,5.25 42.75,12.25 12.25,42.75 42.75,42.75 5.25,49.75 49.75,49.75

## Polygon pours and split planes (outlines as drawn)
NetC26_1 on Top Layer "NETC26_1_L01_P002" (solid, pour order 2): 7.24,22.62 7,22.38 5.54,22.38 5.19,22.73 5.19,25.082 5.412,25.3 8.75,25.3 8.75,33.56 10.53,33.56 11.33,32.76 11.33,25.96 16.54,25.96 16.51,25.93 16.51,23.46 12.47,23.46 11.63,22.62
GND on Top Layer "GND_L01_P003" (solid, pour order 3): 7.45,17.18 6.93,16.66 0.42,16.66 0.12,16.36 0.12,4.41 0.27,4.26 0.27,4.03 0.29,4.01 0.29,3.83 0.39,3.73 0.39,3.38 0.62,3.15 0.62,2.65 1.28,1.99 1.28,1.89 1.68,1.49 1.72,1.49 1.72,1.48 3.18,0.02 15.22,0.02 16.06,0.86 16.06,17.59 15.14,17.59 14.85,17.88 14.85,20.21 15.04,20.4 20.42,20.4 21.87,18.95 21.87,14.43 21.73,14.29 19.51,14.29 19.34,14.12 19.34,9.19 19.5,9.03 23.7,9.03 23.7,23.22 18.11,23.22 18.11,34.05 16.47,34.05 14.26,36.26 5.14,36.26 5.14,34.24 11.36,34.24 12,33.6 12,26.72 16.71,26.72 16.71,23.04 14.6,23.04 14.6,21.49 14.19,21.08 13.25,21.08 12.85,21.48 12.85,22.4 7.45,22.4
12V on Top Layer "12V_L01_P004" (solid, pour order 4): 5.04,33.72 4.84,33.92 4.84,35.348 3.548,35.348 3.54,35.34 3.54,33.76 2.96,33.18 2.96,26.4 0.31,23.75 0.31,17.66 0.62,17.35 6.86,17.35 7.045,17.535 7.045,22.13 5.36,22.13 5.04,22.45
VBAT+ on Top Layer "VBAT+_L01_P000" (solid, pour order 0): 16.35,16.04 16.35,4.47 17.03,3.79 17.6,3.79 18.16,4.35 18.67,4.86 18.67,16.06 17.9,16.83 17.9,20.03 17.62,20.31 17.16,20.31 17.04,20.19 17.04,20.14 16.84,19.94 16.84,16.53

## Keep-outs
Keep-Out Layer:
  circle w0.254: c49.75,49.75 r1.8
  circle w0.254: c49.75,5.25 r1.8
  circle w0.254: c5.25,5.25 r1.8
  circle w0.254: c5.25,49.75 r1.8
  circle w0.254: c12.25,12.25 r1.8
  circle w0.254: c12.25,42.75 r1.8
  circle w0.254: c42.75,12.25 r1.8
  circle w0.254: c42.75,42.75 r1.8
  lines w0.254: -0.01,-0.01 54.99,-0.01 54.99,54.99 -0.01,54.99 -0.01,-0.01 ; 0,5.4 ccw(c5.4,5.4) 5.4,0 12.25,0 42.75,0 49.6,0 ccw(c49.6,5.4) 55,5.4 55,12.25 55,42.75 55,49.6 ccw(c49.6,49.6) 49.6,55 42.75,55 12.25,55 5.4,55 ccw(c5.4,49.6) 0,49.6 0,42.75 0,12.25 0,5.4

## Silkscreen, mask and mechanical layers (free items; w line width, h text height)
Top Overlay:
  circle w0.508: c49.75,49.75 r2.052
  circle w0.508: c49.75,5.25 r2.052
  circle w0.508: c5.25,5.25 r2.052
  circle w0.508: c5.25,49.75 r2.052
  circle w0.508: c12.25,42.75 r2.052
  circle w0.508: c12.25,12.25 r2.052
  circle w0.508: c42.75,12.25 r2.052
  circle w0.508: c42.75,42.75 r2.052
  lines w0.254: 66.46,28.01 66.46,46.51 90.66,46.51 90.66,28.01 66.46,28.01 ; 100.17,46.87 115.67,46.87 115.67,58.87 100.17,58.87 100.17,46.87
Bottom Overlay:
  circle w0.508: c49.75,49.75 r2.052
  circle w0.508: c49.75,5.25 r2.052
  circle w0.508: c5.25,5.25 r2.052
  circle w0.508: c5.25,49.75 r2.052
  circle w0.508: c12.25,42.75 r2.052
  circle w0.508: c12.25,12.25 r2.052
  circle w0.508: c42.75,12.25 r2.052
  circle w0.508: c42.75,42.75 r2.052
  lines w0.254: 79.36,64.74 79.36,79.34 103.86,79.34 103.86,64.74 79.36,64.74
Dimensions:
  lines w0.254: 5.25,5.25 27.5,5.25 ; 5.25,5.25 5.25,27.5 ; 5.25,5.25 12.25,5.25 12.25,12.25 ; 5.25,5.25 5.25,12.25 12.25,12.25 ; 5.25,27.5 27.5,27.5 ; 5.25,27.5 5.25,49.75 ; 5.25,27.5 27.5,27.5 ; 5.25,49.75 27.5,49.75 ; 5.25,49.75 5.25,42.75 12.25,42.75 ; 5.25,49.75 12.25,49.75 12.25,42.75 ; 12.25,12.25 27.5,12.25 ; 12.25,12.25 12.25,27.5 ; 12.25,27.5 27.5,27.5 ; 12.25,27.5 12.25,42.75 ; 12.25,27.5 27.5,27.5 ; 12.25,42.75 27.5,42.75 ; 27.5,5.25 27.5,27.5 ; 27.5,5.25 27.5,27.5 ; 27.5,5.25 49.75,5.25 ; 27.5,12.25 27.5,27.5 ; 27.5,12.25 42.75,12.25 ; 27.5,12.25 27.5,27.5 ; 27.5,27.5 27.5,49.75 ; 27.5,27.5 42.75,27.5 ; 27.5,27.5 42.75,27.5 ; 27.5,27.5 27.5,42.75 ; 27.5,27.5 27.5,42.75 ; 27.5,27.5 49.75,27.5 ; 27.5,27.5 49.75,27.5 ; 27.5,27.5 27.5,49.75 ; 27.5,42.75 42.75,42.75 ; 27.5,49.75 49.75,49.75 ; 42.75,12.25 42.75,27.5 ; 42.75,12.25 49.75,12.25 49.75,5.25 ; 42.75,12.25 42.75,5.25 49.75,5.25 ; 42.75,27.5 42.75,42.75 ; 42.75,42.75 49.75,42.75 49.75,49.75 ; 42.75,42.75 42.75,49.75 49.75,49.75 ; 49.75,5.25 49.75,27.5 ; 49.75,27.5 49.75,49.75